# Altium PCB Andromeda-UIXO-2.PcbDoc
Units mil, origin at the board's own origin, x right, y up, seen from the top; angles counter-clockwise.
Board outline 2700 x 2100 mil, 2 copper layers (Top Layer, Bottom Layer); 49 components, 52 nets, 217 pads, 67 vias.
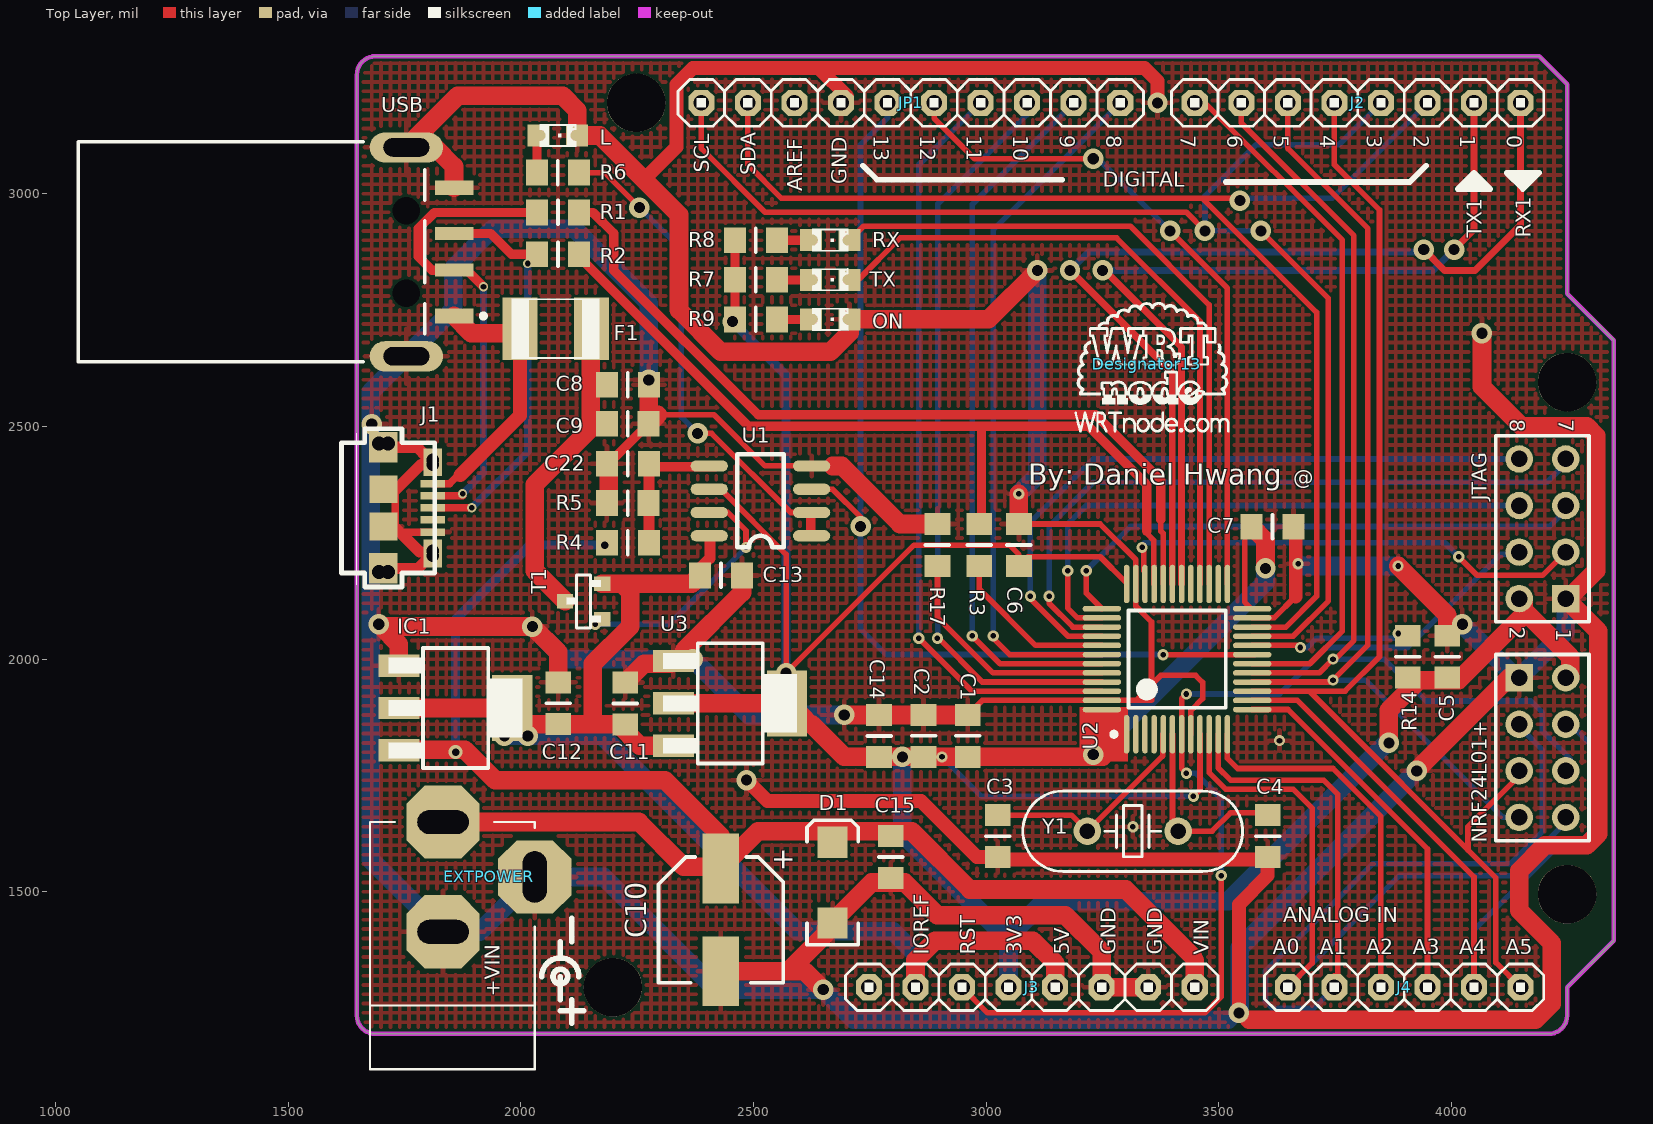
[diagram p0: Top Layer view]
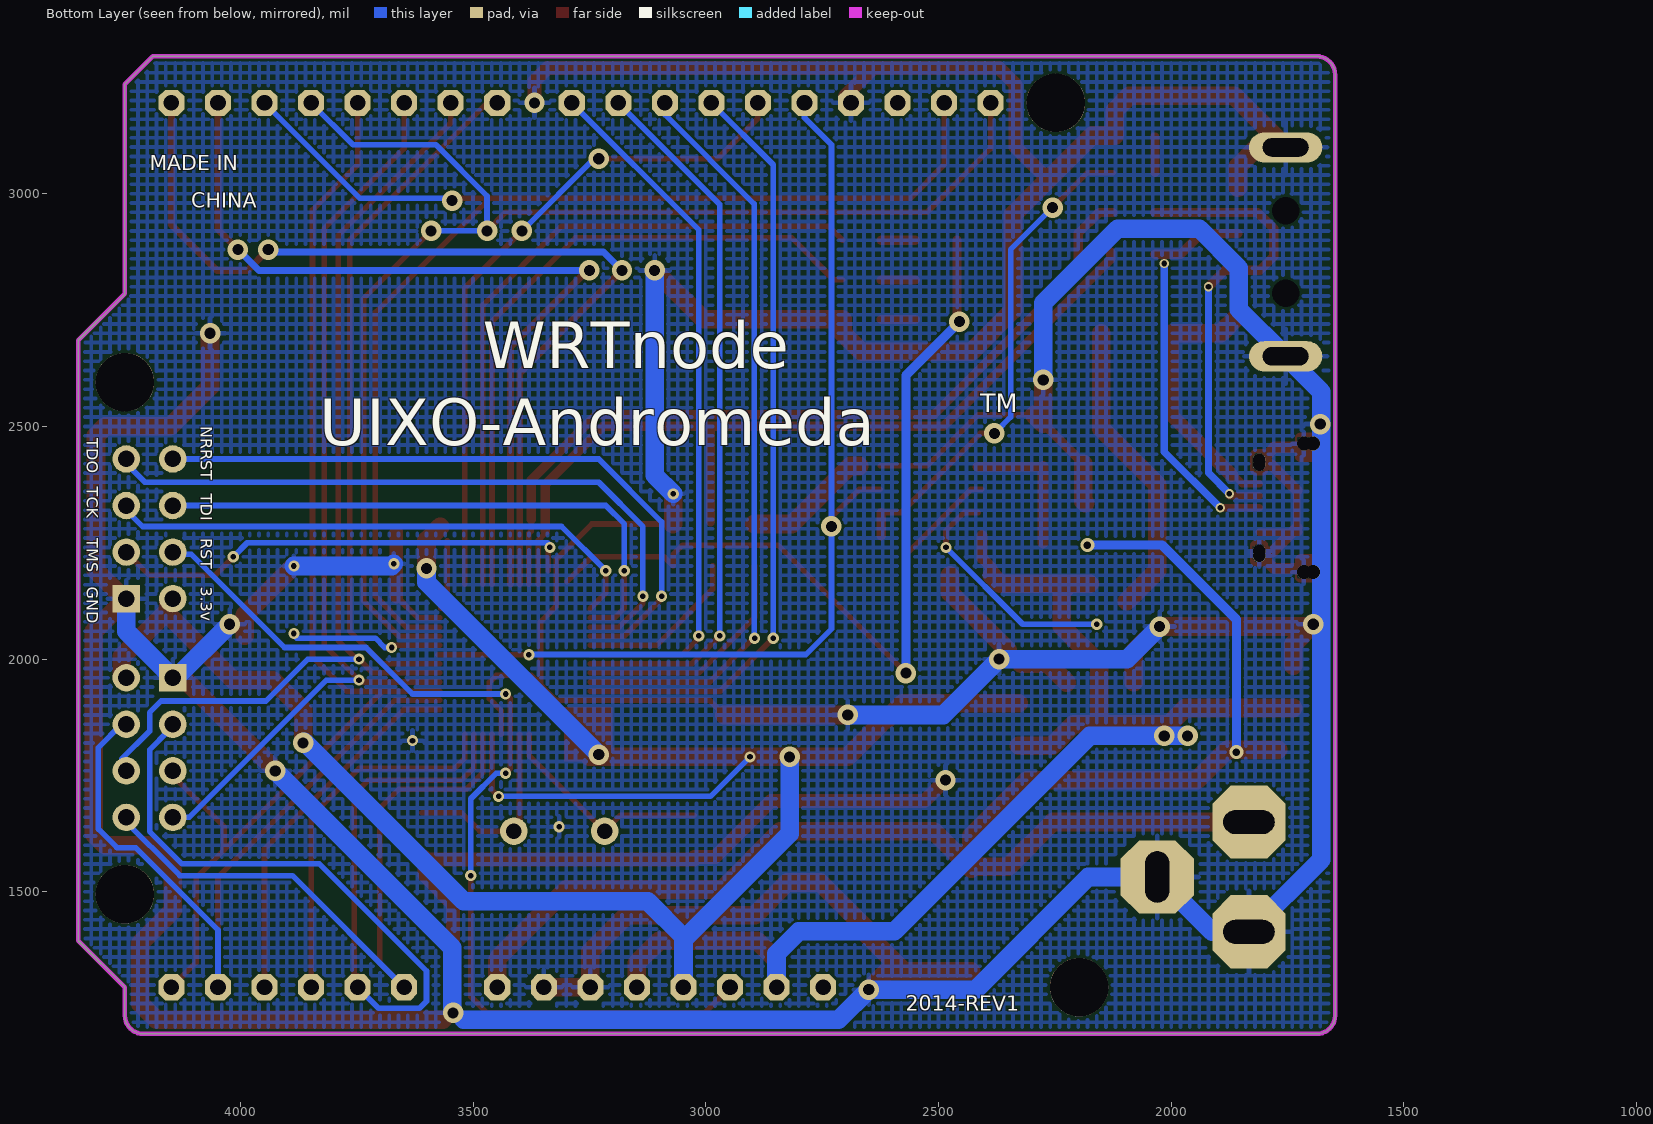
[diagram p1: Bottom Layer view, seen from below]

## Layer stack, top to bottom
Top Layer: signal copper 1.4
Dielectric: dielectric 12.6, FR-4, Dk 4.8
Bottom Layer: signal copper 1.4

## Board outline
1647.98,1234.37 1647.98,3255.63 cw(c1687.35,3255.63) 1687.35,3295 4187.98,3295 4247.98,3235 4247.98,2785 4347.98,2685 4347.98,1395 4247.98,1295 4247.98,1234.37 cw(c4208.61,1234.37) 4208.61,1195 1687.35,1195 cw(c1687.35,1234.37)

## Design rules (kind name [scope] priority, off if disabled: settings)
Clearance [All] p1: gap=5
FabricationTestPointUsage TestPointUsage [All] p1: valid=0 allowmultiple=FALSE
FabricationTestpoint Testpoint [All] p1: side=3 testpointundercomponent=TRUE minsize=40 maxsize=100 preferedsize=60 minholesize=0 maxholesize=40 preferedholesize=32 testpointgrid=1 allowsidetop=TRUE allowsidebottom=TRUE usegrid=TRUE gridtolerance=0.01
PolygonConnect [All] p1: connectstyle=Relief reliefconductorwidth=10 reliefentries=4 polygonreliefangle="90 Angle" airgapwidth=10
RoutingVias [All] p1: holewidth=28 width=35 viastyle="Through Hole" minholewidth=15 minwidth=2 maxholewidth=50 maxwidth=50
SolderMaskExpansion [All] p1: expansion=4
Width [All] p1: maxlimit=40 minlimit=8 preferedwidth=15
26 further rules are at their usual default settings.

## Components (designator, comment, footprint, x,y, rotation, side; value= is the part's Value field where it differs from the comment)
C1 "Cap" RES0805(2012M) 2960,1835 r90 top
C2 "Cap" RES0805(2012M) 2865,1835 r90 top
C3 "Cap" RES0805(2012M) 3025,1620 r270 top
C4 "Cap" RES0805(2012M) 3605,1620 r270 top
C5 "Cap" RES0805(2012M) 3990,2005 r90 top
C6 "Cap" RES0805(2012M) 3070,2245 r90 top
C7 "Cap" RES0805(2012M) 3615,2285 r0 top
C8 "Cap" RES0805(2012M) 2230,2590 r0 top
C9 "100n" RES0805(2012M) 2230,2505 r180 top
C10 "Cap" CAP_SMD 2430,1440 r270 top (schematic designator C7)
C11 "1u" RES0805(2012M) 2225,1905 r270 top
C12 "Cap" RES0805(2012M) 2080,1905 r90 top
C13 "100n" RES0805(2012M) 2430,2180 r0 top
C14 "1u" RES0805(2012M) 2770,1835 r270 top
C15 "Cap" RES0805(2012M) 2795,1575 r270 top
C22 "100n" RES0805(2012M) 2230,2420 r0 top
D1 "SS14" DIODE_SMA 2670,1520 r270 top
Designator13 "Comment" nodeoverlay 3345,2635 r0 top
EXTPOWER "*" POWERSUPPLY_DC-21MM 1830,1400 r180 top
F1 "MF-MSMF050-2 500mA" L1812 2075,2710 r180 top
IC1 "NCP1117ST50T3G" SOT223 1860,1895 r270 top
J1 "USB MICRO" CON2_USB_MICRO_B_AT 1705,2325 r270 top
J2 "8x1F-H8.5" 1X08 3797.98,3195 r180 top
J3 "8x1F-H8.5" 1X08 3097.98,1295 r0 top
J4 "6x1F-H8.5" 1X06 3897.98,1295 r0 top
JP1 "10x1F-H8.5" 1X10 2837.98,3195 r180 top
JTAG "JTAG" HDR2X4 4245,2130 r90 top
L "Yellow" CHIPLED_0805 2080,3125 r270 top
NRF24L01+ "NRF24L01" NRF24L01 4145,1960 r270 top
ON "Green" CHIPLED_0805 2665,2730 r270 top
R1 "Res Semi" RES0805(2012M) 2080,2960 r0 top
R2 "Res Semi" RES0805(2012M) 2080,2870 r0 top
R3 "Res Semi" RES0805(2012M) 2985,2245 r90 top
R4 "Res" RES0805(2012M) 2230,2250 r0 top
R5 "Res" RES0805(2012M) 2230,2335 r180 top
R6 "Res" RES0805(2012M) 2080,3045 r180 top
R7 "Res" RES0805(2012M) 2505,2815 r0 top
R8 "Res" RES0805(2012M) 2505,2900 r0 top
R9 "Res" RES0805(2012M) 2505,2730 r0 top
R14 "Res" RES0805(2012M) 3905,2005 r90 top
R17 "Res" RES0805(2012M) 2895,2245 r90 top
RX "Yellow" CHIPLED_0805 2665,2900 r270 top
T1 "FDN340P" SOT-23 2135,2125 r270 top
TX "Yellow" CHIPLED_0805 2665,2815 r270 top
U1 "LMV358IDGKR" "SO-8 LM358" 2625,2265 r180 top
U2 "STM32F103C8T6" LQFP48_M 3410,2000 r90 top
U3 "REG1117-3.3" SOT223 2450,1905 r270 top
USB "USB" USB/SM2.5-4H4A 1647.98,2875 r180 top
Y1 "8MHz" XTAL_0.4 3315,1630 r180 top

## Footprints (in the part's own frame and the unit in brackets; to place one, negate y for a bottom-side part, rotate by r counter-clockwise, add the part's x,y. Pads: shape width x height; smd on the part's side, far side on the other; paste and mask are expansions set on the pad)
1X06 [mil]
  oct 56x56 hole 33.46: 1(-250,0) 2(-150,0) 3(-50,0) 4(50,0) 5(150,0) 6(250,0)
  silkscreen extent -300,-50 300,50
1X08 [mil]
  oct 56x56 hole 33.46: 1(-350,0) 2(-250,0) 3(-150,0) 4(-50,0) 5(50,0) 6(150,0) 7(250,0) 8(350,0)
  silkscreen extent -400,-50 400,50
1X10 [mil]
  oct 56x56 hole 33.46: 1(-450,0) 2(-350,0) 3(-250,0) 4(-150,0) 5(-50,0) 6(50,0) 7(150,0) 8(250,0) 9(350,0) 10(450,0)
  silkscreen extent -500,-50 500,50
CAP_SMD [mm]
  rect 3.8x2 smd: 1(-2.8,0) 2(2.8,0)
  silkscreen extent -3.42,-3.4 3.43,3.4
CHIPLED_0805 [mm]
  rect 1.2x1.2 smd: A(0,-1.05) C(0,1.05)
  silkscreen extent -0.63,-1 0.63,1
CON2_USB_MICRO_B_AT [mil]
  rect 16x53 smd: P1(-52,106) P2(-26,106) P3(0,106) P4(26,106) P5(52,106)
  rect 65x61 smd: S1(-130,0) S2(130,0)
  rect 60x40 smd: S3(-98,106) S4(98,106)
  rect 60x60 smd: S5(-40,0) S6(40,0)
  round 30 hole 30 unplated: ""(-138,-10) ""(-138,10) ""(138,-10) ""(138,10)
  round 27.56 hole 27.56 unplated: ""(-103,106) ""(-93,106) ""(93,106) ""(103,106)
  Top Layer lines w5: -121,-25 -121,26 -117,26 ; 154,-23 154,23 ; -155,-23 -155,23 ; 106,23 106,-23 111,-23 111,23 116,23 116,-24 120,-24 ccw(c120,-23) 121,-23 121,24 ; -106,25 -106,-25 -108,-25 -108,25 -112,25 -112,-25 -117,-25 -117,26 ; -116,26 -117,26 ; 114,93 ccw(c114,98) 119,98 119,114 ccw(c114,114) 114,119 ; -82,93 ccw(c-82,98) -77,98 -77,114 ccw(c-82,114) -82,119 ; -114,93 cw(c-114,98) -119,98 -120,113 cw(c-114,113) -114,119 ; 81,94 cw(c81,99) 76,99 76,113 cw(c81,113) 81,118 ; 148,-27 ccw(c148,-17) 158,-17 158,17 ccw(c148,17) 148,27 112,27 ccw(c112,17) 102,17 102,-17 ccw(c112,-17) 112,-27 148,-27 ; -111,-27 ccw(c-111,-17) -101,-17 -101,17 ccw(c-111,17) -111,27 -149,27 ccw(c-149,17) -159,17 -159,-17 ccw(c-149,-17) -149,-27 -111,-27 ; 114,89 ccw(c114,99) 124,99 124,113 ccw(c114,113) 114,123 82,123 ccw(c82,113) 72,113 72,99 ccw(c82,99) 82,89 114,89 ; -82,89 ccw(c-82,99) -72,99 -72,113 ccw(c-82,113) -82,123 -114,123 ccw(c-114,113) -124,113 -124,99 ccw(c-114,99) -114,89 -82,89
  silkscreen extent -170,-90 170,110
DIODE_SMA [mm]
  rect 1.7x1.651 smd: 1(2.2,0) 2(-2.2,0)
  silkscreen extent -3.4,-1.4 3.4,1.4, body extent -2.49,-1.3 2.49,1.3, height 2.11
HDR2X4 [mm] "Connector; Header; 4x2 Position"
  rect 1.5x1.5 hole 0.9: 1(0,0)
  round 1.5 hole 0.9: 2(0,2.54) 3(2.54,0) 4(2.54,2.54) 5(5.08,0) 6(5.08,2.54) 7(7.62,0) 8(7.62,2.54)
  silkscreen extent -1.27,-1.27 8.89,3.81
L1812 [mm]
  rect 1.9x3.4 smd: 1(-1.95,0) 2(1.95,0)
  silkscreen extent -2.39,-1.65 2.4,1.65
LQFP48_M [mm]
  oval 2.1x0.3 smd: 1(-4.1,2.75) 2(-4.1,2.25) 3(-4.1,1.75) 4(-4.1,1.25) 5(-4.1,0.75) 6(-4.1,0.25) 7(-4.1,-0.25) 8(-4.1,-0.75) 9(-4.1,-1.25) 10(-4.1,-1.75) 11(-4.1,-2.25) 12(-4.1,-2.75) 25(4.1,-2.75) 26(4.1,-2.25) 27(4.1,-1.75) 28(4.1,-1.25) 29(4.1,-0.75) 30(4.1,-0.25) 31(4.1,0.25) 32(4.1,0.75) 33(4.1,1.25) 34(4.1,1.75) 35(4.1,2.25) 36(4.1,2.75)
  oval 0.3x2.1 smd: 13(-2.75,-4.1) 14(-2.25,-4.1) 15(-1.75,-4.1) 16(-1.25,-4.1) 17(-0.75,-4.1) 18(-0.25,-4.1) 19(0.25,-4.1) 20(0.75,-4.1) 21(1.25,-4.1) 22(1.75,-4.1) 23(2.25,-4.1) 24(2.75,-4.1) 37(2.75,4.1) 38(2.25,4.1) 39(1.75,4.1) 40(1.25,4.1) 41(0.75,4.1) 42(0.25,4.1) 43(-0.25,4.1) 44(-0.75,4.1) 45(-1.25,4.1) 46(-1.75,4.1) 47(-2.25,4.1) 48(-2.75,4.1)
  silkscreen extent -4.22,-2.65 2.65,3.57
nodeoverlay [mil] "WRTnode Overlay"
  silkscreen extent -155,-146 177,132
NRF24L01 [mm] "NRF24L01+"
  rect 1.5x1.5 hole 0.9: 1(0,0)
  round 1.5 hole 0.9: 2(0,2.54) 3(2.54,0) 4(2.54,2.54) 5(5.08,0) 6(5.08,2.54) 7(7.62,0) 8(7.62,2.54)
  silkscreen extent -1.27,-1.27 8.89,3.81
POWERSUPPLY_DC-21MM [mm]
  oct 4x4 hole 1.3 slot 2.794 at 90 deg: 1(-5.08,-3.353)
  oct 4x4 hole 1.3 slot 2.794 at 0 deg: 2(-0.076,-6.35) 3(-0.076,-0.356)
  silkscreen extent -5.08,-6.35 3.91,7.14
RES0805(2012M) [mm]
  rect 1.2x1.4 smd: 1(-1.138,-0.008) 2(1.148,-0.008)
  silkscreen extent 0.01,-0.66 0.01,0.64
"SO-8 LM358" [mil] "作者：王千会"
  oval 80x24 smd: 1(0,0) 2(0,-50) 3(0,-100) 4(0,-150) 5(220,-150) 6(220,-100) 7(220,-50) 8(220,0)
  silkscreen extent 60,-175 160,25, body extent -9,-171 229,21, height 67
SOT223 [mil]
  rect 48x88 smd: 1(-91,-122) 2(0,-122) 3(91,-122)
  rect 141.73x86.61 smd: 4(0,122.01)
  silkscreen extent -129,-144 129,144
SOT-23 [mil]
  rect 31x35 smd: 1(1,-40) 2(-37,40) 3(39,40)
  silkscreen extent -56,-37 58,37
USB/SM2.5-4H4A [mm] "Connector; USB1.1, Type A, SM; 4 Position; Right Angle"
  rect 2.1x0.8 smd: 1(-5.3,3.5) 4(-5.3,-3.5)
  rect 2.1x0.7 smd: 2(-5.3,1) 3(-5.3,-1)
  oval 4x1.65 hole 1 slot 2.5 at 0 deg: 5(-2.7,-5.7) 6(-2.7,5.7)
  round 1.2 hole 1.5 unplated: MH1(-2.7,-2.25) MH2(-2.7,2.25)
  silkscreen extent -7.02,-6 15.2,6
XTAL_0.4 [mm]
  round 1.5 hole 0.85: 1(2.482,-0.008) 2(-2.471,-0.008)
  silkscreen extent -5.99,-2.21 6,2.19

## Part data
C9 C11 C13 C14 C22: library part C-EUC0603
D1: library part DIODE_SWITCH
EXTPOWER: library part POWERSUPPLY_DC21MMX
F1: library part L-EUL1812
IC1: library part MC33269ST-3.3T3
J1: library part MYCON2_USB-MINI-B
J2 J3: library part PINHD-1X8
J4: library part PINHD-1X6
JP1: library part PINHD-1X10
JTAG: library part "Header 4X2", "Header, 4-Pin, Dual row"
L ON RX TX: library part LEDCHIPLED_0805
NRF24L01+: "NRF24L01+"
R1 R2 R3: "Semiconductor Resistor"
R4 R5 R6 R7 R8 R9 R14 R17: "Resistor"
T1: library part PMOSSOT23
U1: library part LMV358MMX
U2: "STM32 ARM-based 32-bit MCU with 64 Kbytes Flash, 48-pin LQFP, Industrial Temperature"
U3: "800mA and 1A Low Dropout Positive Regulator 2.85V, 3.3V, 5V, and Adjustable"
Y1: library part XTAL, "Crystal Oscillator"

## Free pads (board coordinates)
  round 125.98 hole 125.98 unplated: ""(2197.98,1295) ""(2247.98,3195) ""(4247.98,1495) ""(4247.98,2595)

## Via types
v1: diameter 44, hole 24, Top Layer to Bottom Layer, 34 vias
v2: diameter 24, hole 12, Top Layer to Bottom Layer, 27 vias
v3: diameter 20, hole 12, Top Layer to Bottom Layer, 4 vias
v4: diameter 30, hole 16, Top Layer to Bottom Layer, 2 vias

## Nets (pads, with @x,y where several pads share a name; then routed paths per layer and width w, separated by ;. In a path a pad name is that pad's centre, name@x,y a point inside that pad or via, vN(x,y) a via of type N, cw(c..) or ccw(c..) an arc to the next point about the centre after c; other vN are vias at no path point)
+3.3V: C1.1 C2.1 C5.1 C6.1 C7.1 C14.2 J3.4 JTAG.2 NRF24L01+.2 R7.1 R8.1 R9.1 R14.1 U1.6 U2.1 U2.9 U2.24 U2.36 U2.48 U3.2 U3.4 | length 7078.3
  Top Layer w12: U1.6@2406.85,2365 2430,2365 2570,2225 v1(2570,1970) 2845,2245 3050,2245 3070.32,2224.68 C6.1 3090.11,2220 3245,2220 U2.36@3298.58,2166.42 ; v2(3445,1705) 3459.21,1719.21 U2.9 ; 3555,2254.46 3555,2122.8 U2.24@3568.9,2108.9
  Top Layer w20: R9.1 R7.1 R8.1
  Top Layer w40: U3.2 2577.01,1905 U3.4@2612.01,1870 ; 2625,1860 2695,1790 v2(2905,1790) v1@3250,1790 ; C7.1 3600,2254.89 v1(3600,2195) ; v1(3865,1820) 3865,1890 3930,1955 4015,1955 4155,2095 JTAG.2@4155,2130 ; JTAG.2@4155,2105 4255,2005 NRF24L01+.2@4255,1960
  Bottom Layer w12: v2(2905,1790) 2990,1705 v2(3445,1705)
  Bottom Layer w20: v1(2455,2725) 2570,2610 v1(2570,1970)
  Bottom Layer w40: v1(2820,1790) 2820,1625 3047.98,1397.02 ; J3.4 3047.98,1397.02 ; v1(3230,1795) 3600,2165 v1(3600,2195) ; v1@3862.5,1822.5 3520,1480 3125,1480 3047.98,1402.98 3047.98,1397.02
+5V: C11.2 C12.1 C13.1 IC1.2 IC1.4 J3.2 J3.5 T1.2 U1.8 U3.3 | length 2863.7
  Top Layer w24: C13.1 2385.22,2195.22 2406.85,2216.85 U1.8@2406.85,2265
  Top Layer w40: IC1.2 1970,1895 IC1.4@2005,1860 ; IC1.4@2015,1860 2210,1860 2256,1814 U3.3 ; 2155,1860 2155,1990 2235,2070 2235,2145 2218,2162 ; T1.2 2218,2162 ; C13.1 2367.54,2162 2218,2162 ; J3.2 2847.98,1352.98 2890,1395 3100,1395 3147.98,1347.02 J3.5
  Bottom Layer w40: v1(1965,1835) v1(2015,1835) 2175,1835 2595,1415 2800,1415 2847.98,1367.02 J3.2
A0: J4.1 NRF24L01+.8 U2.10 | length 1499.9
  Top Layer w12: U2.10 3478.9,1756.1 3515,1720 3660,1720 3700,1680 3700,1347.02 J4.1
  Bottom Layer w12: J4.1 3887.98,1535 4130,1535 NRF24L01+.8@4255,1660
A1: J4.2 NRF24L01+.3 U2.11 | length 1987.6
  Top Layer w12: U2.11 3498.58,1766.42 3525,1740 3725,1740 3755,1710 3755,1312.98 3747.98,1320 J4.2
  Bottom Layer w12: J4.2 3702.98,1250 3615,1250 3600,1265 3600,1330 3830,1560 4125,1560 4195,1630 4195,1805 4155,1845 NRF24L01+.3@4155,1860
A2: J4.3 U2.12 | length 800.2
  Top Layer w12: U2.12 3518.27,1786.73 3540,1765 3745,1765 3847.98,1662.02 J4.3
A3: J4.4 U2.13 | length 797.7
  Top Layer w12: U2.13 3648.27,1891.73 3947.98,1592.02 J4.4
A4: J4.5 NRF24L01+.4 U2.14 | length 1586.3
  Top Layer w12: U2.14 3668.58,1911.42 4047.98,1532.02 J4.5
  Bottom Layer w12: J4.5 4047.98,1417.98 4225,1595 4265,1595 4305,1635 4305,1810 NRF24L01+.4@4255,1860
A5: J2.5 J4.6 NRF24L01+.5 U2.15 | length 2578.3
  Top Layer w12: U2.15 3693.9,1931.1 ; J2.5 3747.98,3062.02 3845,2965 3845,2005 3771.1,1931.1 3693.9,1931.1 ; 4035,1590 4035,1640 NRF24L01+.5@4155,1760 ; J4.6 4095,1347.98 4095,1530 3693.9,1931.1
A6: J2.6 NRF24L01+.7 U2.16 | length 2059.8
  Top Layer w12: U2.16 3740.79,1950.79 3820,2030 3820,2925 3647.98,3097.02 J2.6 ; NRF24L01+.7 NRF24L01+.7@4155,1660
  Bottom Layer w12: v2(3745,1955) 3815,1955 4110,1660 NRF24L01+.7@4155,1660
A7: J2.7 NRF24L01+.6 U2.17 | length 2152.2
  Top Layer w12: J2.7 3547.98,3152.02 3790,2910 3790,2040 3745,1995 v2(3745,2000) 3715.47,1970.47 U2.17
  Bottom Layer w12: v2@3750,2000 3855,2000 3945,1910 4170,1910 4195,1885 4195,1845 4255,1785 NRF24L01+.6@4255,1760
AREF: JP1.8
BOOT0: R17.1 U2.44 | length 513.2
  Top Layer w12: R17.1 2895.32,2089.68 3014.53,1970.47 U2.44
CMP: C22.2 R4.2 R5.1 U1.5 | length 305.8
  Top Layer w20: C22.2@2275.22,2413.35 U1.5@2417.32,2413.35
  Top Layer w24: R4.2 C22.2@2275.22,2413.35
D+: J1.P3 R2.1 USB.3 | length 855.8
  Top Layer w16: J1.P3 v3(1895,2325)
  Top Layer w20: USB.3 1935.63,2914.37 1980.32,2869.68 R2.1
  Bottom Layer w16: v3(1895,2325) 2015,2445 v3(2015,2850)
D-: J1.P2 R1.1 USB.2 | length 1024.2
  Top Layer w16: J1.P2 v3@1875,2351
  Top Layer w20: v3(1920,2800) 1884.37,2835.63 USB.2 1809.37,2835.63 1780,2865 1780,2925 1814.68,2959.68 R1.1
  Bottom Layer w16: v3(1875,2355) 1920,2400 v3(1920,2800)
GATE_CMD: T1.3 U1.7 | length 513.8
  Top Layer w12: U1.7@2414.68,2315 2445,2315 2484,2276 v2(2484,2240)
  Bottom Layer w12: v2(2160,2075) 2319,2075 v2(2484,2240)
GND: C1.2 C2.2 C3.2 C4.2 C5.2 C6.2 C7.2 C8.2 C9.1 C10.2 C11.1 C12.2 C13.2 C14.1 C15.2 C22.1 D1.1 EXTPOWER.1 EXTPOWER.3 IC1.1 J1.@1695,2187 J1.@1695,2463 J1.@1715,2187 J1.@1715,2463 J1.@1811,2222 J1.@1811,2232 J1.P5 J1.S1 J1.S2 J1.S3 J1.S4 J1.S5 J1.S6 J3.6 J3.7 JP1.7 JTAG.1 L.C NRF24L01+.1 ON.C R5.2 R17.2 U1.4 U2.8 U2.23 U2.35 U2.47 U3.1 USB.4 USB.5 USB.6 | length 20239.8
  Top Layer w12: C9.1@2294.46,2525 2415,2525 2525,2415 U1.4 ; C1.2 2991.53,1911.42 U2.47 3355,1911.42 3355,2080 3321.42,2113.58 U2.35 3321.32,2161.51 3321.32,2213.68 3244.78,2290.22 C6.2 ; 3321.42,1911.42 3375,1965 3450,1965 3465,1950 3465,1915 3439.53,1889.53 U2.8 ; U2.23 3618.58,2088.58 3665,2135 ; C7.2@3665,2274.46 C7.2@3675.22,2284.68
  Top Layer w16: J1.S6@1725.98,2273 J1.P5 ; J1.S6@1730,2282.98 J1.S5@1730,2362.02
  Top Layer w20: C22.1@2188.68,2419.68 C9.1@2274.99,2505.98
  Top Layer w24: J1.S2@1695,2195 1778.98,2195 J1.S4 ; J1.S1@1695,2455 1778.98,2455 1811,2418 1785.98,2418 J1.S5@1730,2362.02 ; J1.S6@1730,2282.98 1782.98,2230 J1.S4@1807.98,2230
  Top Layer w30: 2265,3030 2335,3100 2335,3235 2370,3270 2640,3270 ; v1(2485,1740) 2530,1695 2860,1695 2980.22,1574.78 C3.2 ; JP1.7@2701.49,3208.51 2640,3270 ; C3.2@3024.68,1569.78 C4.2@3604.68,1569.78 ; v1(3367.98,3195) 3367.98,3242.02 3340,3270 2640,3270 ; v1(3542.98,1240) 3542.98,1472.98 3604.68,1534.68 C4.2@3604.68,1569.78 ; C4.2 C4.2@3604.68,1569.78 ; 3665,2135 C7.2@3665,2274.46
  Top Layer w40: IC1.1 1738,2032 1700,2070 v1(2025,2070) 2080.32,2014.68 C12.2 ; USB.4 1856.64,3058.36 1815.59,3099.41 USB.5 1864.87,3210 2090,3210 2121.34,3178.66 L.C 2170,3125 2265,3030 2340,2955 2340,2750 2430,2660 2665,2660 2706.34,2701.34 ON.C 3005,2730 v1(3110,2835) ; R5.2 2188.68,2339.22 C22.1@2188.68,2419.68 ; C11.1 2264.89,1990 2322,1990 U3.1 ; C9.1 C9.1@2294.46,2525 ; C9.1@2275.22,2505.76 C8.2 ; U3.1@2351,2019 2475.22,2143.22 C13.2 ; C10.2 2610.24,1329.76 v1(2650,1290) ; 2574.76,1329.76 2655.32,1410.32 2655.32,1421.3 2754.03,1520 2825,1520 2895,1450 3170,1450 3247.98,1372.02 J3.6 J3.7 ; 2670,2415 2690,2415 2814.78,2290.22 R17.2 ; v1(2695,1880) C1.2@2960.11,1880 ; v2(3070,2355) 3070,2290.54 C6.2 ; 3565,1225 4180,1225 4215,1260 4215,1390 4145,1460 4145,1545 4200,1600 4290,1600 4315,1625 4315,2060 JTAG.1 4250,2130 4310,2190 4310,2480 4290,2500 4150,2500 4065,2585 v1(4065,2700) ; v2(3885,2200) 3990.32,2094.68 C5.2 ; v1@3933.99,1771.01 NRF24L01+.1@4122.98,1960 ; NRF24L01+.1 NRF24L01+.1@4155,1960
  Bottom Layer w40: v1(2025,2070) 2095,2000 v1(2370,2000) 2490,1880 v1(2695,1880) ; v1(2275,2600) 2275,2765 2115,2925 1940,2925 1855,2840 1855,2751.31 USB.6 1677.98,2574.29 1677.98,1569.02 EXTPOWER.3 1912,1414 EXTPOWER.1 2178,1532 2420,1290 v1(2650,1290) 2715,1225 3520,1225 ; v2(3070,2355) 3110,2395 v1(3110,2835) ; v1@3545,1250 3545,1380 v1(3925,1760) ; v2(3670,2205) 3675,2200 v2(3885,2200) ; v1(4022.98,2075) 4137.98,1960 NRF24L01+.1 4245,2060 JTAG.1
  other v1: 1695,2075 1680,2505
  other v2: 3315,1640 3630,1825
JNTRST: JTAG.8 U2.40 | length 1471.7
  Top Layer w12: v2@3092.43,2132.43 3175.64,2049.21 U2.40
  Bottom Layer w12: v2@3095,2129.86 3095,2295 3230,2430 JTAG.8@4155,2430
  other v2: 3095,2135
JTCK: JTAG.5 U2.37 | length 1198.6
  Top Layer w12: v2(3215,2190) 3215,2141.85 U2.37
  Bottom Layer w12: v2@3220,2190 v2(3215,2190) 3310,2285 4210,2285 JTAG.5@4255,2330
JTDI: JTAG.6 U2.38 | length 1259
  Top Layer w12: v2(3175,2190) 3175,2110 3196.42,2088.58 U2.38
  Bottom Layer w12: v2(3175,2190) 3175,2290 3215,2330 JTAG.6@4155,2330
JTDO: JTAG.7 U2.39 | length 1494.8
  Top Layer w12: v2(3135,2135) 3135,2120 3186.1,2068.9 U2.39 ; JTAG.7@4240,2410 JTAG.7@4240,2425
  Bottom Layer w12: v2(3135,2135) 3135,2285 3230,2380 4205,2380 JTAG.7@4255,2430
JTMS: JTAG.3 U2.34 | length 1009.6
  Top Layer w12: v2(3335,2240) 3338.32,2236.68 U2.34@3338.32,2190 ; v2(4015,2220) 4055,2180 4195,2180 JTAG.3@4240,2225
  Bottom Layer w12: v2@3332.5,2242.5 3340,2250 3985,2250 v2(4015,2220)
LL: R6.1 U1.1 U1.2 | length 1069.7
  Top Layer w12: R6.1 2179.68,3045.32 v1(2255,2970) ; v1(2380,2485) 2410,2485 2580,2315 U1.2@2623.19,2315
  Top Layer w20: U1.1@2623.19,2265 U1.2@2623.19,2315
  Bottom Layer w12: v1@2255,2985 v1(2255,2970) 2345,2880 2345,2520 v1@2375,2490
NetC3_1: C3.1 U2.5 Y1.1 | length 482.1
  Top Layer w12: C3.1 3182.82,1664.78 Y1.1 3378.9,1791.94 U2.5@3378.9,1838.58
NetC4_1: C4.1 U2.6 Y1.2 | length 427
  Top Layer w12: U2.6 3400.16,1642.45 Y1.2 3485.32,1630.32 3524.78,1669.78 C4.1@3609.68,1669.78
NetJ3_1: J3.1
NetL_A: L.A R6.2 | length 81.3
  Top Layer w12: L.A@2034.78,3121.12 L.A
  Top Layer w20: R6.2 L.A@2034.78,3121.12
NetON_A: ON.A R9.2 | length 73.1
  Top Layer w20: R9.2 ON.A@2623.34,2729.68
NetR7_2: R7.2 TX.A | length 73.1
  Top Layer w20: R7.2 TX.A@2623.34,2814.68
NetR8_2: R8.2 RX.A | length 73.1
  Top Layer w20: R8.2 RX.A@2623.34,2899.68
NetR14_2: R14.2 U2.20 | length 330.1
  Top Layer w12: U2.20 3670.47,2029.53 v2(3675,2025)
  Bottom Layer w12: v2(3675,2025) 3690,2025 3710,2045 3878.83,2045 3885,2051.17 v2(3885,2055)
NRST: J3.3 JTAG.4 U2.7 | length 2124.8
  Top Layer w12: J3.3 3002.98,1240 3470,1240 3505,1275 v2(3505,1535) ; v2(3430,1755) 3419.84,1765.16 U2.7 3419.84,1914.84 v2(3430,1925)
  Bottom Layer w12: v2(3430,1925) 3630,1925 3730,2025 3905,2025 4105,2225 JTAG.4@4140,2225 ; v2@3435,1755 3450,1755 3505,1700 v2(3505,1535)
PA9/TXD1: J2.2 U2.30 | length 1862.4
  Top Layer w15: v1@3245,2845 3419.84,2670.16 U2.30 ; v1(4005,2880) 4047.98,2922.98 J2.2
  Bottom Layer w15: v1(3250,2835) 3960,2835 v1(4005,2880)
PA10/RXD1: J2.1 U2.31 | length 2063.3
  Top Layer w15: v1@3185,2830 3399.69,2615.31 U2.31@3399.69,2161.42 ; v1(3940,2880) 3985,2835 4050,2835 4147.98,2932.98 J2.1
  Bottom Layer w15: v1(3180,2835) 3220,2875 v1@3940,2875
PB0: J2.8 U2.18 | length 1501.7
  Top Layer w12: J2.8 3470,3195 3765,2900 3765,2060 3695.16,1990.16 U2.18
PB1: JP1.6 U1.3 U2.19 | length 2172.3
  Top Layer w12: U1.3 2670,2365 2730,2305 v1(2730,2285) ; v2(3380,2009.53) U2.19@3575.47,2009.53
  Bottom Layer w12: JP1.6 2787.98,3162.98 2730,3105 v1(2730,2285) 2730,2065 2785,2010 3379.53,2010 v2(3380,2009.53)
PB6: JP1.1 U2.42 | length 1509.8
  Top Layer w12: v2@3012.5,2047.5 3050.16,2009.84 U2.42
  Bottom Layer w12: v2(3015,2050) 3015,2922.02 JP1.1
PB7: JP1.2 U2.43 | length 1538.7
  Top Layer w12: v2(2970,2050) 3029.84,1990.16 U2.43
  Bottom Layer w12: v2(2970,2050) 2970,2977.02 JP1.2
PB8: JP1.3 U2.45 | length 1620.3
  Top Layer w12: v2@2896.14,2046.13 2991.48,1950.79 U2.45
  Bottom Layer w12: v2@2896.14,2046.13 2896.14,2978.16 3087.98,3170 JP1.3
  other v2: 2895,2045
PB9: JP1.4 U2.46 | length 1645.8
  Top Layer w12: v2(2855,2045) 2968.9,1931.1 U2.46
  Bottom Layer w12: v2(2855,2045) 2855,3062.02 JP1.4
PB10/SCL: J2.4 JP1.10 U2.21 | length 2962.2
  Top Layer w12: JP1.10 2387.98,3097.02 2525,2960 3430,2960 v1(3470,2920) ; U2.21 3659.21,2049.21 3735,2125 3735,2775 v1(3590,2920) ; J2.4@3847.98,3192.02 J2.4
  Bottom Layer w12: v1(3590,2920) v1(3470,2920) 3470,2995 3580,3105 3757.98,3105 J2.4
PB11/SDA: J2.3 JP1.9 U2.22 | length 2832.2
  Top Layer w12: JP1.9 2487.98,3062.02 2560,2990 3465,2990 ; v1(3545,2985) 3540,2990 3465,2990 ; U2.22 3643.9,2068.9 3710,2135 3710,2745 3465,2990
  Bottom Layer w12: v1@3545,2990 3742.98,2990 J2.3
PB12: JP1.5 U2.25 | length 1442.8
  Top Layer w12: JP1.5 2887.98,3162.02 2975,3075 v1(3230,3075) ; v1@3400,2915 3518.27,2796.73 U2.25
  Bottom Layer w12: v1(3230,3075) 3240,3075 v1(3395,2920)
RD+: R2.2 R3.2 U2.33 | length 1850.4
  Top Layer w12: 3345,2270 3360,2255 U2.33@3360,2161.42
  Top Layer w20: R2.2@2130.22,2874.68 2130.22,2859.78 2490,2500 2990,2500 ; R3.2@2990,2294.89 2990,2500 ; 3345,2275 3345,2375 3220,2500 2990,2500
RD-: R1.2 U2.32 | length 1760.3
  Top Layer w12: 3375,2300 3375,2275 3380,2270 U2.32@3380,2161.42
  Top Layer w20: R1.2 2155.32,2959.68 2200,2915 2200,2835 2510,2525 3235,2525 3375,2385 3375,2300
RXLED: RX.C U2.27 | length 1454.6
  Top Layer w12: RX.C 2736.34,2930 3310,2930 3478.9,2761.1 U2.27
TXLED: TX.C U2.28 | length 1428.8
  Top Layer w12: TX.C 2725,2815 2815,2905 3280,2905 3459.21,2725.79 U2.28
USB_CON: R3.1 U2.41 | length 363.2
  Top Layer w12: R3.1 2985.32,2150.22 3106.01,2029.53 U2.41
USBID: J1.P4
VIN: C10.1 C15.1 D1.2 EXTPOWER.2 IC1.3 J3.8 R4.1 | length 3335.4
  Top Layer w40: IC1.3@1770,1805 1880,1805 1945,1740 2310,1740 2430,1620 C10.1 2509.76,1630 2840,1630 2965,1505 3300,1505 3445,1360 ; EXTPOWER.2 EXTPOWER.2@1863,1650 ; EXTPOWER.2@1873,1660 EXTPOWER.2@1863,1650 ; C10.1@2420,1554.06 2350,1554.06 2254.05,1650 EXTPOWER.2@1863,1650 ; J3.8 3447.98,1352.02
  Bottom Layer w20: v4(1860,1800) 1860,2085 2020,2245 v4(2180,2245)
VUSB: C8.1 C9.2 F1.1 T1.1 | length 654.1
  Top Layer w24: F1.1@2150,2700 F1.1@2151.77,2700
  Top Layer w40: T1.1@2095.5,2124.5 2030,2190 2030,2375 2150,2495 F1.1@2150,2700
XUSB: F1.2 J1.P1 USB.1 | length 597.8
  Top Layer w16: J1.P1 1847,2377 1880,2410
  Top Layer w30: 1870,2395 1998.23,2523.23 F1.2@1998.23,2700
  Top Layer w40: USB.1 1893.85,2700 F1.2@1998.23,2700
pads on no net: J1.@1811,2418 J1.@1811,2428 U2.2 U2.3 U2.4 U2.26 U2.29 USB.MH1 USB.MH2

## Polygon pours and split planes (outlines as drawn)
GND on Bottom Layer "Top Layer-No Net" (hatched 90Degree grid 20 track 8, remove dead copper, pour order 2): 1647.98,3245 1697.98,3295 1700,3295 4187.98,3295 4247.98,3235 4247.98,2785 4347.98,2685 4347.98,1395 4247.98,1295 4247.98,1234.37 4247.98,1222.98 4220,1195 1690,1195 1687.35,1195 1647.98,1234.37 1647.98,3240
GND on Top Layer "Top Layer-No Net" (hatched 90Degree grid 20 track 8, remove dead copper, pour order 4): 1647.98,3245 1650,3245 1700,3295 4187.98,3295 4247.98,3235 4247.98,2785 4347.98,2685 4347.98,1395 4247.98,1295 4247.98,1234.37 4208.61,1195 1687.35,1195 1647.98,1234.37 1647.98,3245

## Keep-outs
Keep-Out Layer:
  the board outline again, w10

## Other copper
Top Layer:
  region net +3.3V: 3304.73,1780 3304.73,1896.73 3200,1896.73 3200,1780

## Silkscreen, mask and mechanical layers (free items; w line width, h text height)
Top Overlay:
  circle w12: c2085,1317.98 r15.81
  lines w2: 2710.48,1314.02 2710.48,1314.02
  lines w12: 2045,1317.98 cw(c2085,1317.98) 2085,1357.98 ; 2085,1245 2135,1245 ; 2085,1267.98 2085,1317.98 ; 2085,1392.98 2085,1357.98 ; 2110,1217.98 2110,1267.98 ; 2110,1392.98 2110,1442.98 ; 2125,1317.98 ccw(c2085,1317.98) 2085,1357.98 ; 2735,3060 2765,3030 3162.98,3030 ; 3515,3025 3910,3025 3945,3060 ; 4027.98,3015 4047.98,3035 4067.98,3015 4037.98,3015 4052.98,3025 ; 4132.98,3040 4172.98,3040 4152.98,3020 4137.98,3035 4157.98,3035 ; 4152.98,3025 4152.98,3030 ; 4012.98,3010 4047.98,3045 4082.98,3010 4012.98,3010 ; 4117.98,3045 4152.98,3010 4187.98,3045 4117.98,3045
  text "13" at 2757.98,3125 h32 r270
  text "12" at 2857.98,3125 h32 r270
  text "11" at 2957.98,3125 h32 r270
  text "10" at 3057.98,3125 h32 r270
  text "9" at 3157.98,3125 h32 r270
  text "8" at 3257.98,3125 h32 r270
  text "7" at 3417.98,3125 h32 r270
  text "6" at 3517.98,3125 h32 r270
  text "5" at 3617.98,3125 h32 r270
  text "4" at 3717.98,3125 h32 r270
  text "3" at 3817.98,3125 h32 r270
  text "2" at 3917.98,3125 h32 r270
  text "1" at 4017.98,3125 h32 r270
  text "0" at 4117.98,3125 h32 r270
  text "SCL" at 2405,3045 h32 r90
  text "SDA" at 2505,3040 h32 r90
  text "GND" at 2700,3020 h32 r90
  text "DIGITAL" at 3250,3015 h32
  text "AREF" at 2605,3005 h32 r90
  text "TX1" at 4065,2905 h32 r90
  text "RX1" at 4170,2905 h32 r90
  text "By: Daniel Hwang" at 3090,2375 h45
  text "@" at 3660,2375 h32
  text "ANALOG IN" at 3637.98,1435 h32
  text "5V" at 3178.5,1365.33 h32 r90
  text "GND" at 3278.5,1365.33 h32 r90
  text "GND" at 3378.5,1365.33 h32 r90
  text "VIN" at 3478.5,1365.33 h32 r90
  text "A0" at 3616.04,1365.48 h32
  text "A1" at 3716.04,1365.48 h32
  text "A2" at 3816.04,1365.48 h32
  text "A3" at 3916.04,1365.48 h32
  text "A4" at 4016.04,1365.48 h32
  text "A5" at 4116.04,1365.48 h32
  text "IOREF" at 2876.81,1364.48 h32 r90
  text "RST" at 2976.81,1364.48 h32 r90
  text "3V3" at 3076.81,1364.48 h32 r90
  text "+VIN" at 1955,1275 h32 r90
Bottom Overlay:
  text "MADE IN" at 4195,3050 h32
  text "CHINA" at 4105,2970 h32
  text "WRTnode" at 3478.9,2625 h100
  text "TM" at 2410,2530 h40
  text "NRRST" at 4085,2500 h25 r90
  text "TDO" at 4330,2475 h25 r90
  text "UIXO-Andromeda" at 3830,2460 h100
  text "TCK" at 4330,2370 h25 r90
  text "TDI" at 4085,2355 h25 r90
  text "RST" at 4085,2260 h25 r90
  text "TMS" at 4330,2260 h25 r90
  text "3.3v" at 4085,2155 h25 r90
  text "GND" at 4330,2155 h25 r90
  text "2014-REV1" at 2570,1245 h32

## Text inside footprints (layer, text, board x,y; h text height)
C10: Top Overlay "+" at 2545,1595 h45 r270
JTAG: Top Overlay "2" at 4125,2070 h32 r270; Top Overlay "1" at 4225,2065 h32 r270; Top Overlay "7" at 4230,2515 h32 r270; Top Overlay "8" at 4125,2515 h32 r270